# Altium PCB 3v3_led.pcbdoc
Units mm, origin at the board's own origin, x right, y up, seen from the top; angles counter-clockwise.
Board outline 112 x 20 mm, 2 copper layers (Top Layer, Bottom Layer); 2 components, 0 nets, 15 pads, 0 vias.
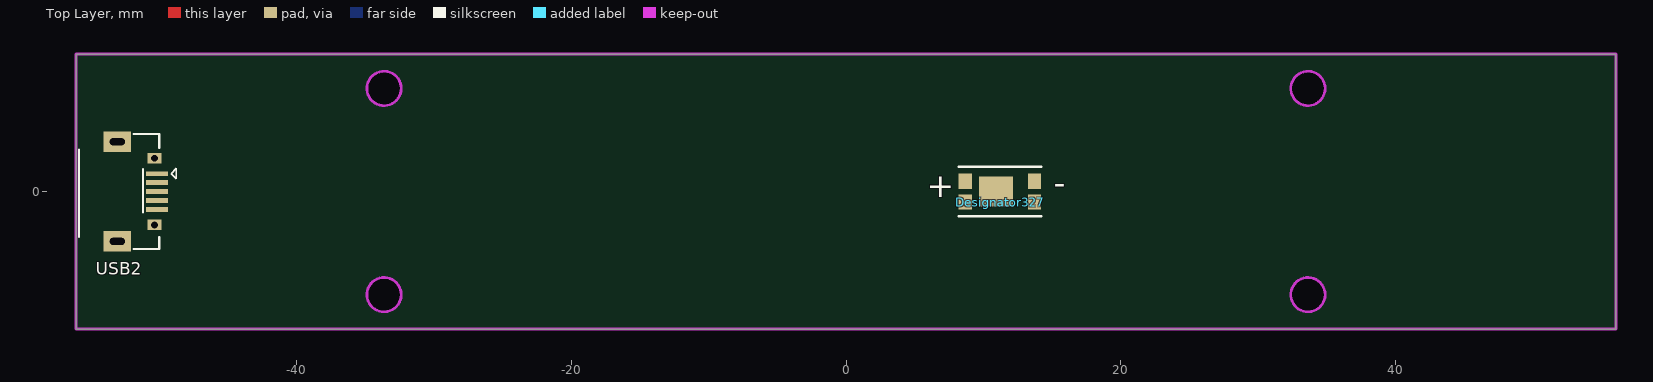
[diagram p0: Top Layer view]
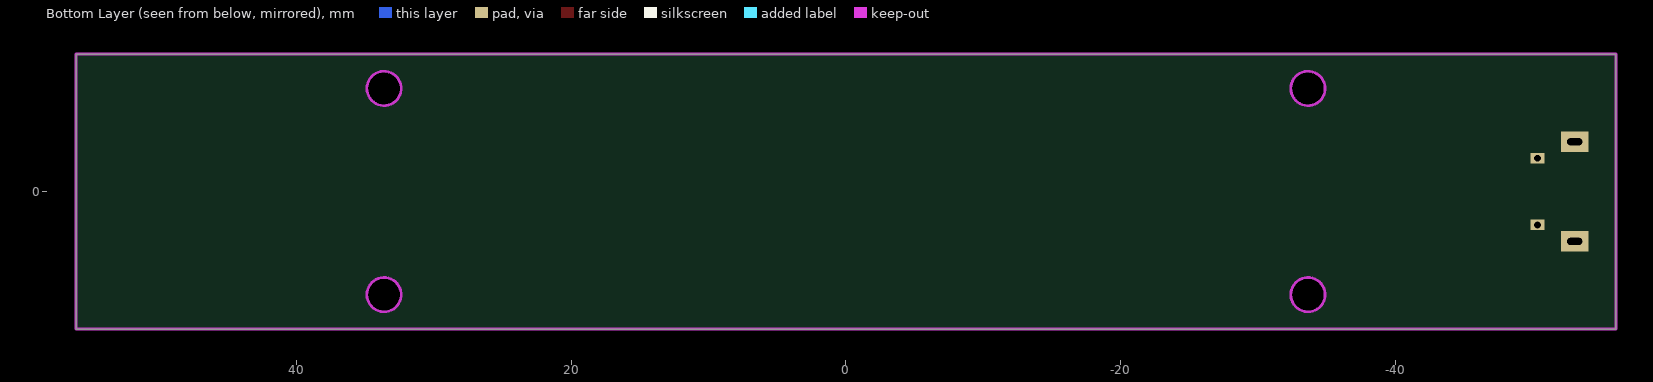
[diagram p1: Bottom Layer view, seen from below]

## Layer stack, top to bottom
Top Solder: solder mask 0.0102, Solder Resist, Dk 3.5
Top Layer: signal copper 0.0356
Dielectric 1: dielectric 0.32, FR-4, Dk 4.8
Bottom Layer: signal copper 0.0356
Bottom Solder: solder mask 0.0102, Solder Resist, Dk 3.5

## Board outline
-56,-10 56,-10 56,10 -56,10
cut-out: -33.6,6.25 cw(c-33.6,7.5) -34.85,7.5 cw(c-33.6,7.5) -33.6,8.75 cw(c-33.6,7.5) -32.35,7.5 cw(c-33.6,7.5)
cut-out: -33.6,-8.75 cw(c-33.6,-7.5) -34.85,-7.5 cw(c-33.6,-7.5) -33.6,-6.25 cw(c-33.6,-7.5) -32.35,-7.5 cw(c-33.6,-7.5)
cut-out: 33.6,6.25 cw(c33.6,7.5) 32.35,7.5 cw(c33.6,7.5) 33.6,8.75 cw(c33.6,7.5) 34.85,7.5 cw(c33.6,7.5)
cut-out: 33.6,-8.75 cw(c33.6,-7.5) 32.35,-7.5 cw(c33.6,-7.5) 33.6,-6.25 cw(c33.6,-7.5) 34.85,-7.5 cw(c33.6,-7.5)

## Design rules (kind name [scope] priority, off if disabled: settings)
Clearance [OnLayer('Top Layer') vs OnLayer('Keep-Out Layer')] p1: gap=1.1
PolygonConnect [All] p1: connectstyle=Relief reliefconductorwidth=0.254 reliefentries=4 polygonreliefangle="90 Angle" airgapwidth=0.254
RoutingVias [All] p1: holewidth=0.711 width=1.27 viastyle="Through Hole" minholewidth=0.711 minwidth=1.27 maxholewidth=0.711 maxwidth=1.27
SolderMaskExpansion [All] p1: expansion=0.102
Width [All] p1: maxlimit=0.254 minlimit=0.254 preferedwidth=0.254
30 further rules are at their usual default settings.

## Components (designator, comment, footprint, x,y, rotation, side; value= is the part's Value field where it differs from the comment)
Designator327 "Comment" NEW5630 11.2,0 r180 top
USB2 "USB-5P" USB-MICRO_A -53,0 r270 top

## Footprints (in the part's own frame and the unit in brackets; to place one, negate y for a bottom-side part, rotate by r counter-clockwise, add the part's x,y. Pads: shape width x height; smd on the part's side, far side on the other; paste and mask are expansions set on the pad)
NEW5630 [mm]
  rrect50% 0.4x0.4 on Top Overlay: 0(-2.6,2.3)
  rect 2.45x2.2 smd mask+0: 1(0.295,0)
  rect 0.95x1.1 smd mask+0: 1(2.525,-0.75) 1(2.525,0.75) 2(-2.525,-0.75) 2(-2.525,0.75)
  silkscreen extent -3,-1.8 3,1.8, body extent -2.8,-1.5 2.8,1.5, height 0.9
USB-MICRO_A [mm] "micro型USB ，5.7*7.8*2.5mm"
  rect 0.35x1.6 smd: 1(-1.3,2.9) 2(-0.65,2.9) 3(0,2.9) 4(0.65,2.9) 5(1.3,2.9)
  rect 1.5x2 hole 0.5 slot 1.1 at 90 deg: 5(-3.625,0) 5(3.625,0)
  rect 0.762x1 hole 0.5: 5(-2.425,2.71) 5(2.425,2.71)
  silkscreen extent -4.19,-2.79 4.19,4.3, body extent -4,-2.71 4,2.89, height 2.8

## Part data
USB2: "微型USB母座"

## Nets (pads, with @x,y where several pads share a name; then routed paths per layer and width w, separated by ;. In a path a pad name is that pad's centre, name@x,y a point inside that pad or via, vN(x,y) a via of type N, cw(c..) or ccw(c..) an arc to the next point about the centre after c; other vN are vias at no path point)
pads on no net: Designator327.0 Designator327.1 Designator327.2 USB2.1 USB2.2 USB2.3 USB2.4 USB2.5

## Keep-outs
Keep-Out Layer:
  circle w0.2: c-33.6,7.5 r1.25
  circle w0.2: c-33.6,-7.5 r1.25
  circle w0.2: c33.6,7.5 r1.25
  circle w0.2: c33.6,-7.5 r1.25
  lines w0.2: -56,-10 -56,10 56,10 56,-10 -56,-10

## Silkscreen, mask and mechanical layers (free items; w line width, h text height)
Top Overlay:
  text "-" at 15.107,-0.787 h3
  text "+" at 5.873,-0.988 h3